# EAGLE board arquivo BRD para PCD - nobreak (EAGLE 9.7.0)

Size 142.66 x 82.18 mm. Coordinates in mm from the lower left corner, seen from the top.
Outline: 0,0 142.66,0 142.66,82.18 0,82.18 0,0
Copper layers (1*16): Top 0.035mm / dielectric 1.5mm / Bottom 0.035mm
Design rules "default": minimum track width 6mil, minimum drill 0.35mm, track to track 6mil, track to pad 6mil, pad to pad 6mil, via to via 6mil, smd to smd 6mil, copper to edge 40mil, drill to drill 6mil, minimum pad ring 10mil, minimum via ring 8mil, stop-mask expansion 4mil, vias tented up to drill 0mil, thermal gap 10mil

## Footprints (pad centres in the part's own frame; a part is rotated, then mirrored left to right if it is on the bottom)
BATTERY-GENERIC = drill 1.118 pad 3.15 octagon: + 2.54,0; - -2.54,0
CAPPRD254W65D500H1150B = drill 0.85 pad 1.45: 1 -1.27,0; 2 1.27,0
DIODE-AXIAL = drill 1: 1 -5.08,0; 2 5.08,0
LEDRD254W60D565H860B_B = drill 0.981 pad 1.581: 1 -1.27,0; 2 1.27,0
LU-5-R = drill 0.8: 1 -6.35,-3.81; 5 3.81,-3.81; 6 6.35,-3.81; 7 6.35,3.81; 8 3.81,3.81; 12 -6.35,3.81
1X02 = drill 1.016 long: 1 -1.27,0; 2 1.27,0
RESAD1016W63L850D250B = drill 0.83 pad 1.43: 1 -5.08,0; 2 5.08,0
SWITCH-SPDT-PTH-8.5X3.7MM = drill 1.016 pad 1.88: 1 -2.54,0; 2 0,0; 3 2.54,0

## Placement (x,y rotation side)
BAT1  9V  [BATTERY-GENERIC]  56.66,12.04 270 top
C1  4400u  [CAPPRD254W65D500H1150B]  117.28,74.36 0 top
C2  2200u  [CAPPRD254W65D500H1150B]  117.43,57.91 0 top
D1  DIODEDIODE-AXIAL  [DIODE-AXIAL]  53.05,48.53 90 top
D2  DIODEDIODE-AXIAL  [DIODE-AXIAL]  97.38,49.29 0 top
D3  BLUE  [LEDRD254W60D565H860B_B]  37.97,33.26 0 top
K1  RELAY-SPDT_LU-5-R  [LU-5-R]  85.95,45.48 180 top
L1  LIGHTBULB  [1X02]  136.95,31.79 0 top
P1  BATTERYGENERIC  [BATTERY-GENERIC]  8.26,63.76 180 top
R1  56  [RESAD1016W63L850D250B]  74.2,55.45 0 top
R2  1k  [RESAD1016W63L850D250B]  33.13,42.84 90 top
S1  TOGGLE  [SWITCH-SPDT-PTH-8.5X3.7MM]  30.75,53.99 0 top
S2  TOGGLE  [SWITCH-SPDT-PTH-8.5X3.7MM]  69.91,6.99 0 top

## Library data of the parts
BAT1 C1 C2 D1 D2 K1 L1 P1 R1 R2 S1 S2 = Tinkercad
D3 = Tinkercad; CATEGORY: Opto-Electronic; SUB-CATEGORY: LED; VALUE: LED_BLUE

## Nets
BAT1+: BAT1.+ S2.2
D2_A: D2.1 K1.1
D3_A: D3.1 R2.1
L1_1: C1.1 C2.1 D2.2 L1.1
P1+: P1.+ S1.2
P1-: BAT1.- C1.2 C2.2 D1.1 D3.2 K1.8 L1.2 P1.-
R1_2: K1.5 R1.2
S1_S: D1.2 K1.6 R1.1 R2.2 S1.3
S2_S: K1.7 S2.3

## Tracks (layer width: path | path; a pad name or v marks a point on that pad's centre or on a via)
BAT1+  (1 unrouted)
D2_A  (1 unrouted)
D3_A  (1 unrouted)
L1_1  (3 unrouted)
P1+  (1 unrouted)
P1-  (7 unrouted)
R1_2  (1 unrouted)
S1_S  (4 unrouted)
S2_S  (1 unrouted)